# Altium PCB PCB2.PcbDoc
Units mil, origin at the board's own origin, x right, y up, seen from the top; angles counter-clockwise.
Board outline 5091.57 x 4010.03 mil, 2 copper layers (Top Layer, Bottom Layer); 15 components, 4 nets, 32 pads, 0 vias.
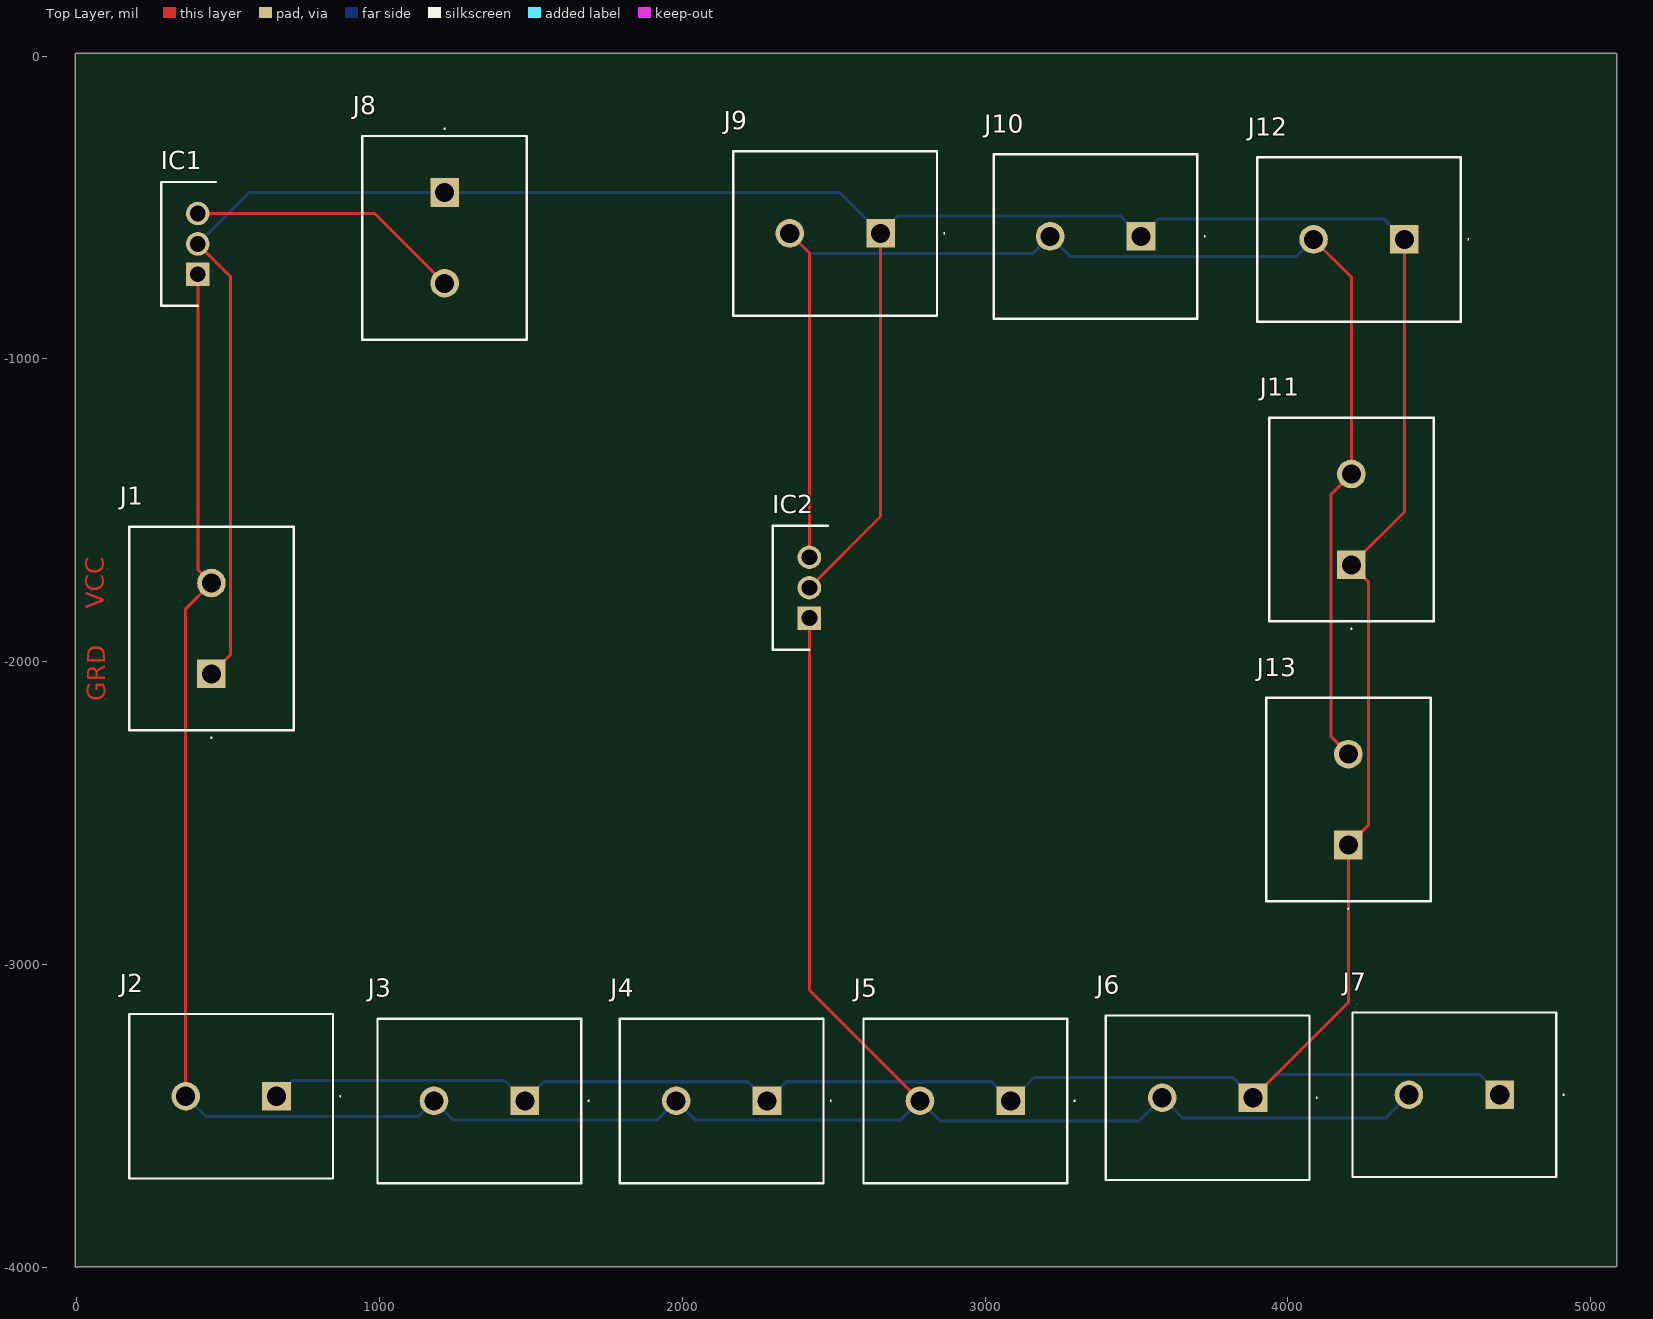
[diagram p0: Top Layer view]
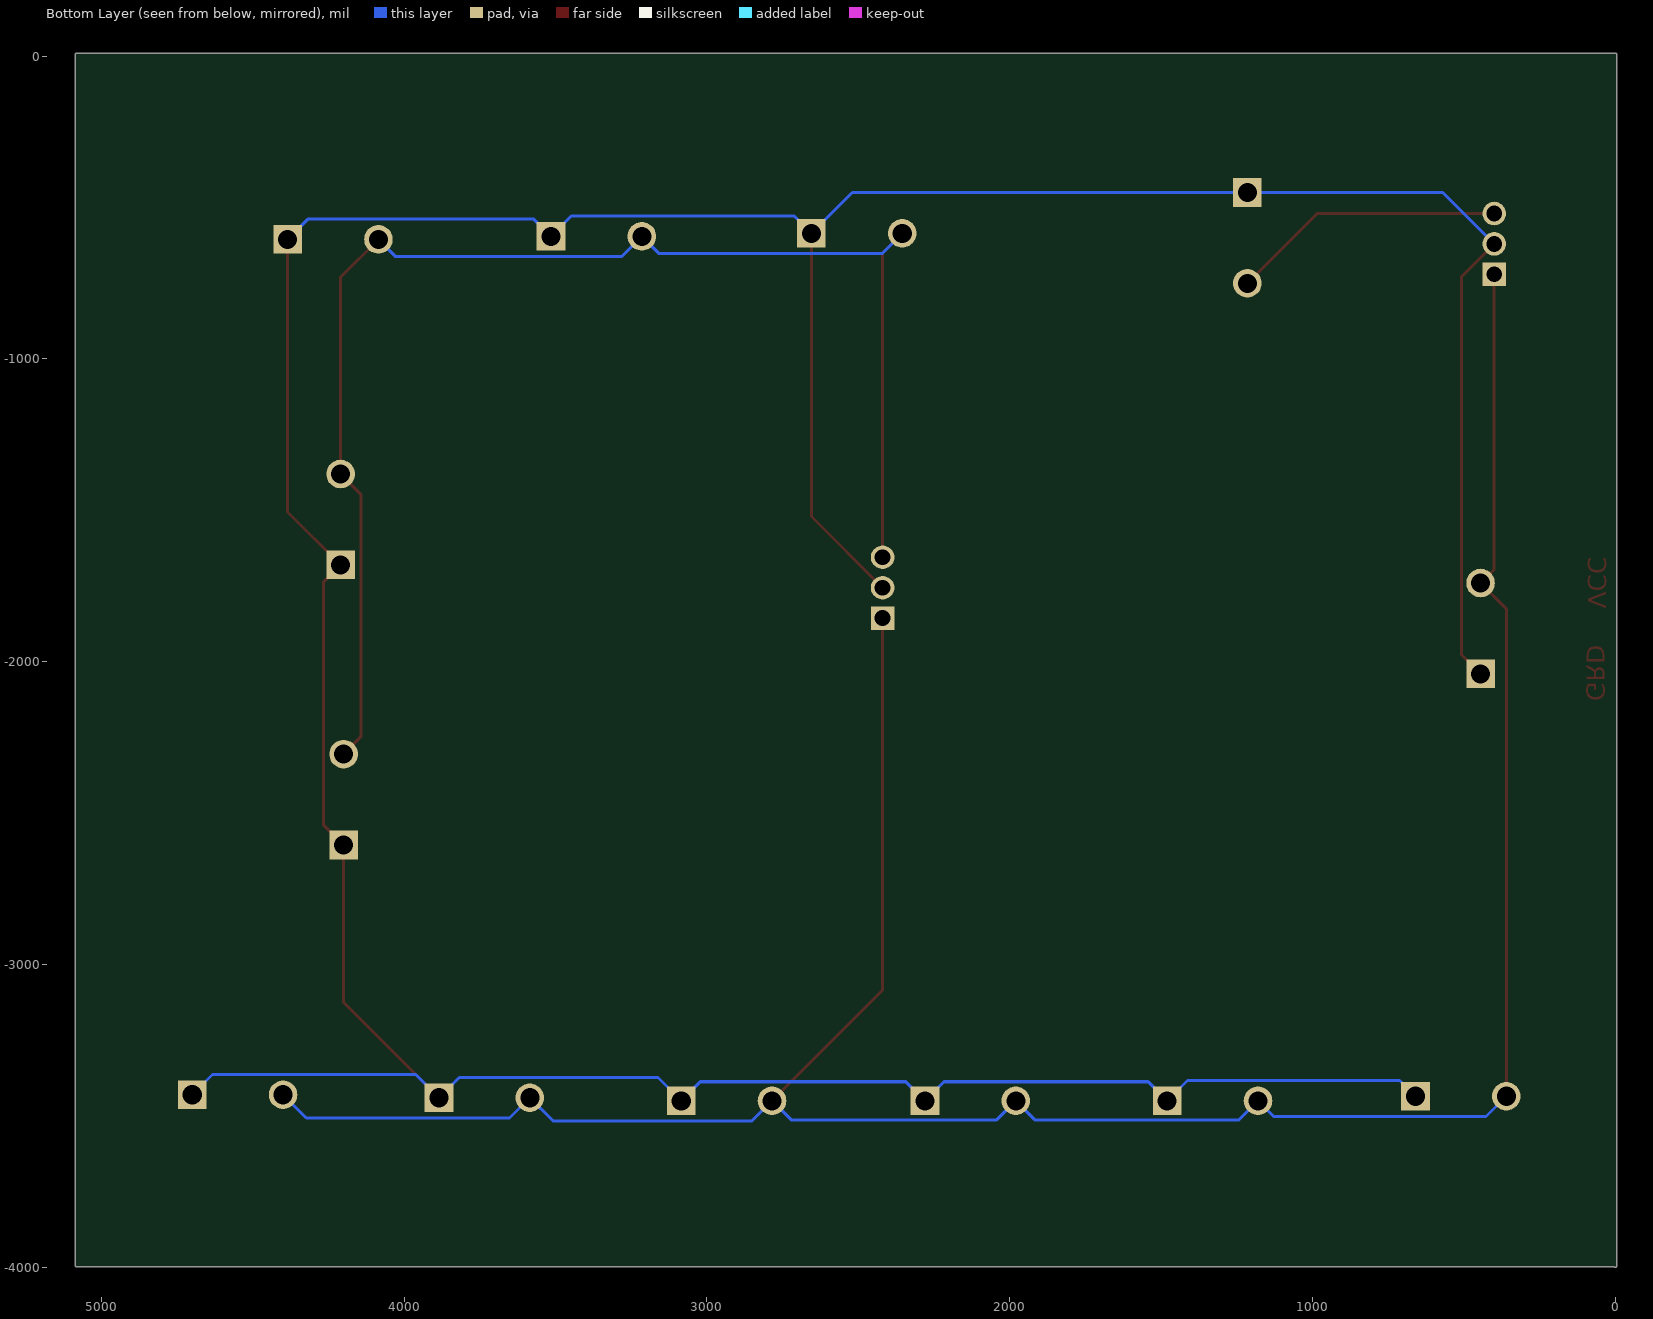
[diagram p1: Bottom Layer view, seen from below]
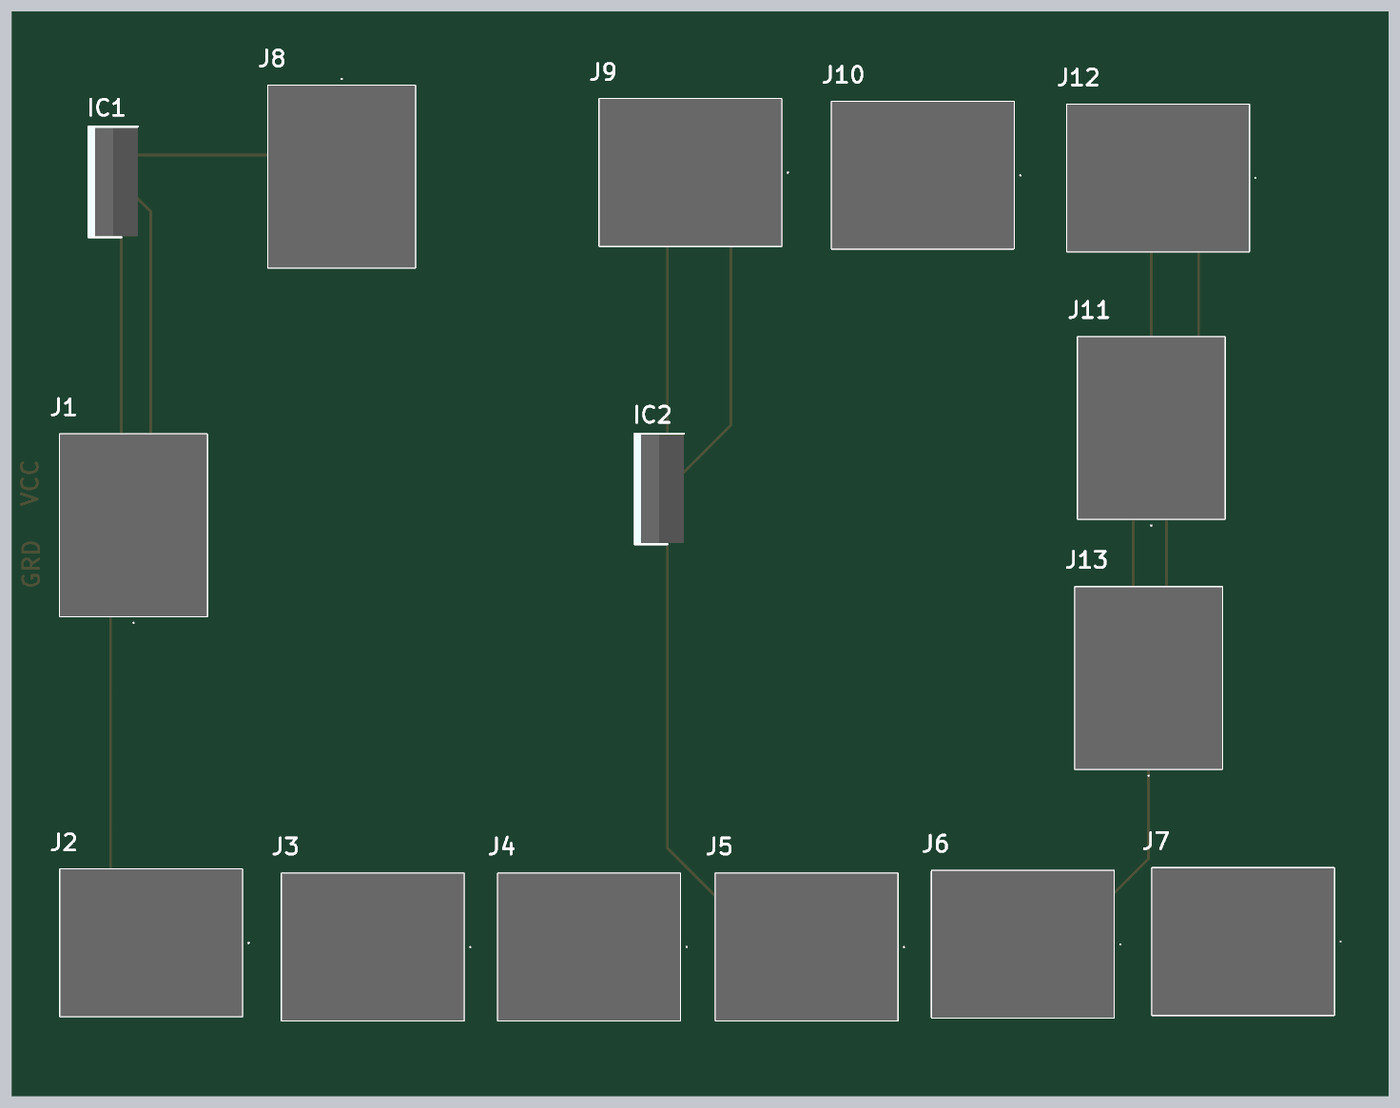
[diagram p2: 3D render of the assembled board from above, using the file's embedded part models]

## Layer stack, top to bottom
Top Solder: solder mask 0.4, Solder Resist, Dk 3.5
Top Layer: signal copper 1.4
Dielectric 1: dielectric 12.6, FR-4, Dk 4.8
Bottom Layer: signal copper 1.4
Bottom Solder: solder mask 0.4, Solder Resist, Dk 3.5

## Board outline
-5.01,-3995 -5.01,5 cw(c0,5) 0,10.02 5081.54,10.02 cw(c5081.54,5) 5086.56,5 5086.56,-3993.46 cw(c5081.54,-3993.46) 5081.54,-3998.47 3.62,-3998.47 cw(c0,-3995)

## Design rules (kind name [scope] priority, off if disabled: settings)
Clearance [All] p1: gap=10 ignorepadtopadclearanceinfootprint=FALSE except(0: Arc-Hole Track-Hole SMDPad-Hole THPad-Hole Via-Hole Fill-Hole Poly-Hole Region-Hole Text-Hole)
PolygonConnect [All] p1: connectstyle=Relief reliefconductorwidth=10 reliefentries=4 polygonreliefangle="90 Angle" airgapwidth=10
RoutingVias [All] p1: holewidth=28 width=50 viastyle="Through Hole" minholewidth=28 minwidth=50 maxholewidth=28 maxwidth=50
SolderMaskExpansion [All] p1: expansion=4 istentingtop=FALSE
Width [All] p1: maxlimit=10 minlimit=10 preferedwidth=10
30 further rules are at their usual default settings.

## Components (designator, comment, footprint, x,y, rotation, side; value= is the part's Value field where it differs from the comment)
IC1 "L7812CV" TO255P460X1020X2008-3P 400,-720.39 r90 top
IC2 "L7805CV" TO255P460X1020X2008-3P 2420,-1855.79 r90 top
J1 "KF25C-7.62-2P" KF25C7622P 445,-2040 r90 top
J2 "KF25C-7.62-2P" KF25C7622P 660,-3435 r180 top
J3 "KF25C-7.62-2P" KF25C7622P 1480,-3450 r180 top
J4 "KF25C-7.62-2P" KF25C7622P 2280,-3450 r180 top
J5 "KF25C-7.62-2P" KF25C7622P 3085,-3450 r180 top
J6 "KF25C-7.62-2P" KF25C7622P 3885,-3440 r180 top
J7 "KF25C-7.62-2P" KF25C7622P 4700,-3430 r180 top
J8 "KF25C-7.62-2P" KF25C7622P 1215,-450 r270 top
J9 "KF25C-7.62-2P" KF25C7622P 2655,-585 r180 top
J10 "KF25C-7.62-2P" KF25C7622P 3515,-595 r180 top
J11 "KF25C-7.62-2P" KF25C7622P 4210,-1680 r90 top
J12 "KF25C-7.62-2P" KF25C7622P 4385,-605 r180 top
J13 "KF25C-7.62-2P" KF25C7622P 4200,-2605 r90 top

## Footprints (in the part's own frame and the unit in brackets; to place one, negate y for a bottom-side part, rotate by r counter-clockwise, add the part's x,y. Pads: shape width x height; smd on the part's side, far side on the other; paste and mask are expansions set on the pad)
KF25C7622P [mm]
  rect 2.4x2.4 hole 1.6: 1(0,0)
  round 2.4 hole 1.6: 2(7.62,0)
  silkscreen extent -5.4,-6.9 12.36,6.9, body extent -4.73,-6.9 12.35,6.9, height 15
TO255P460X1020X2008-3P [mm]
  rect 1.98x1.98 hole 1.32: 1(0,0)
  round 1.98 hole 1.32: 2(2.55,0) 3(5.1,0)
  silkscreen extent -2.65,-1.53 7.75,3.07, body extent -2.55,-1.53 7.65,3.07, height 19.21

## Part data
IC1: "Integrated Circuit", Manufacturer_Name=STMicroelectronics, Mouser Part Number=511-L7812CV, Arrow Part Number=L7812CV, Arrow Price/Stock=https://www.arrow.com/en/products/l7812cv/stmicroelectronics?region=europe, Datasheet Link=http://www.st.com/web/en/resource/technical/document/datasheet/CD00000444.pdf, Height=4.6mm, Manufacturer_Part_Number=L7812CV, Mouser Price/Stock=https://www.mouser.co.uk/ProductDetail/STMicroelectronics/L7812CV?qs=5Uvc6lfWVJzVGZQZmBynyg%3D%3D
IC2: "Integrated Circuit", Manufacturer_Name=STMicroelectronics, Mouser Part Number=511-L7805CV, Arrow Part Number=L7805CV, Arrow Price/Stock=https://www.arrow.com/en/products/l7805cv/stmicroelectronics?region=europe, Datasheet Link=http://www.st.com/web/en/resource/technical/document/datasheet/CD00000444.pdf, Height=4.6mm, Manufacturer_Part_Number=L7805CV, Mouser Price/Stock=https://www.mouser.co.uk/ProductDetail/STMicroelectronics/L7805CV?qs=9NrABl3fj%2FqplZAHiYUxWg%3D%3D
J1 J2 J3 J4 J5 J6 J7 J8 J9 J10 J11 J12 J13: "Connector", Manufacturer_Name=KEFA, Datasheet Link=https://datasheet.lcsc.com/lcsc/2007211836_Cixi-Kefa-Elec-KF25C-7-62-2P_C707361.pdf, Height=14.9mm, Manufacturer_Part_Number=KF25C-7.62-2P

## Nets (pads, with @x,y where several pads share a name; then routed paths per layer and width w, separated by ;. In a path a pad name is that pad's centre, name@x,y a point inside that pad or via, vN(x,y) a via of type N, cw(c..) or ccw(c..) an arc to the next point about the centre after c; other vN are vias at no path point)
GND: IC1.2 IC2.2 J1.1 J2.1 J3.1 J4.1 J5.1 J6.1 J7.1 J8.1 J9.1 J10.1 J11.1 J12.1 J13.1 | length 14374.9
  Top Layer w10: IC1.2 508,-728 508,-1977 J1.1 ; IC2.2 2655,-1520.39 J9.1 ; J6.1 4200,-3125 J13.1 4267,-2538 4267,-1737 J11.1 4385,-1505 J12.1
  Bottom Layer w10: IC1.2 570,-450 J8.1 2520,-450 J9.1 2712,-528 3448,-528 J10.1 3572,-538 4318,-538 J12.1 ; J2.1 712,-3383 1413,-3383 J3.1 1543,-3387 2217,-3387 J4.1 2343,-3387 3022,-3387 J5.1 3162,-3373 3818,-3373 J6.1 3962,-3363 4633,-3363 J7.1
NetIC1_1: IC1.1 IC2.1 J1.2 J2.2 J3.2 J4.2 J5.2 J6.2 J7.2 | length 8826.8
  Top Layer w10: J2.2 360,-1825 J1.2 400,-1695 IC1.1 ; IC2.1 2420,-3085 J5.2
  Bottom Layer w10: J2.2 427,-3502 1128,-3502 J3.2 1243,-3513 1917,-3513 J4.2 2043,-3513 2722,-3513 J5.2 2852,-3517 3508,-3517 J6.2 3652,-3507 4323,-3507 J7.2
NetIC1_3: IC1.3 J8.2 | length 910.4
  Top Layer w10: IC1.3 984.61,-519.61 J8.2
NetIC2_3: IC2.3 J9.2 J10.2 J11.2 J12.2 J13.2 | length 4732.8
  Top Layer w10: J9.2 2420,-650 IC2.3 ; J12.2 4210,-730 J11.2 4143,-1447 4143,-2248 J13.2
  Bottom Layer w10: J9.2 2422,-652 3158,-652 J10.2 3282,-662 4028,-662 J12.2

## Other copper
Top Layer:
  text "VCC" at 90,-1825 h60 r90
  text "GRD" at 95,-2130 h60 r90

## Silkscreen, mask and mechanical layers (free items; w line width, h text height)
CUTOUT:
  lines w10: 0,-3995 0,5 4697.08,5 5081.54,5 5081.54,-3993.46 1.54,-3993.46